# Altium PCB stepperMountBoard.PcbDoc
Units mm, origin at the board's own origin, x right, y up, seen from the top; angles counter-clockwise.
Board outline 50 x 250 mm, 2 copper layers (Top Layer, Bottom Layer); 12 components, 0 nets, 26 pads, 0 vias.
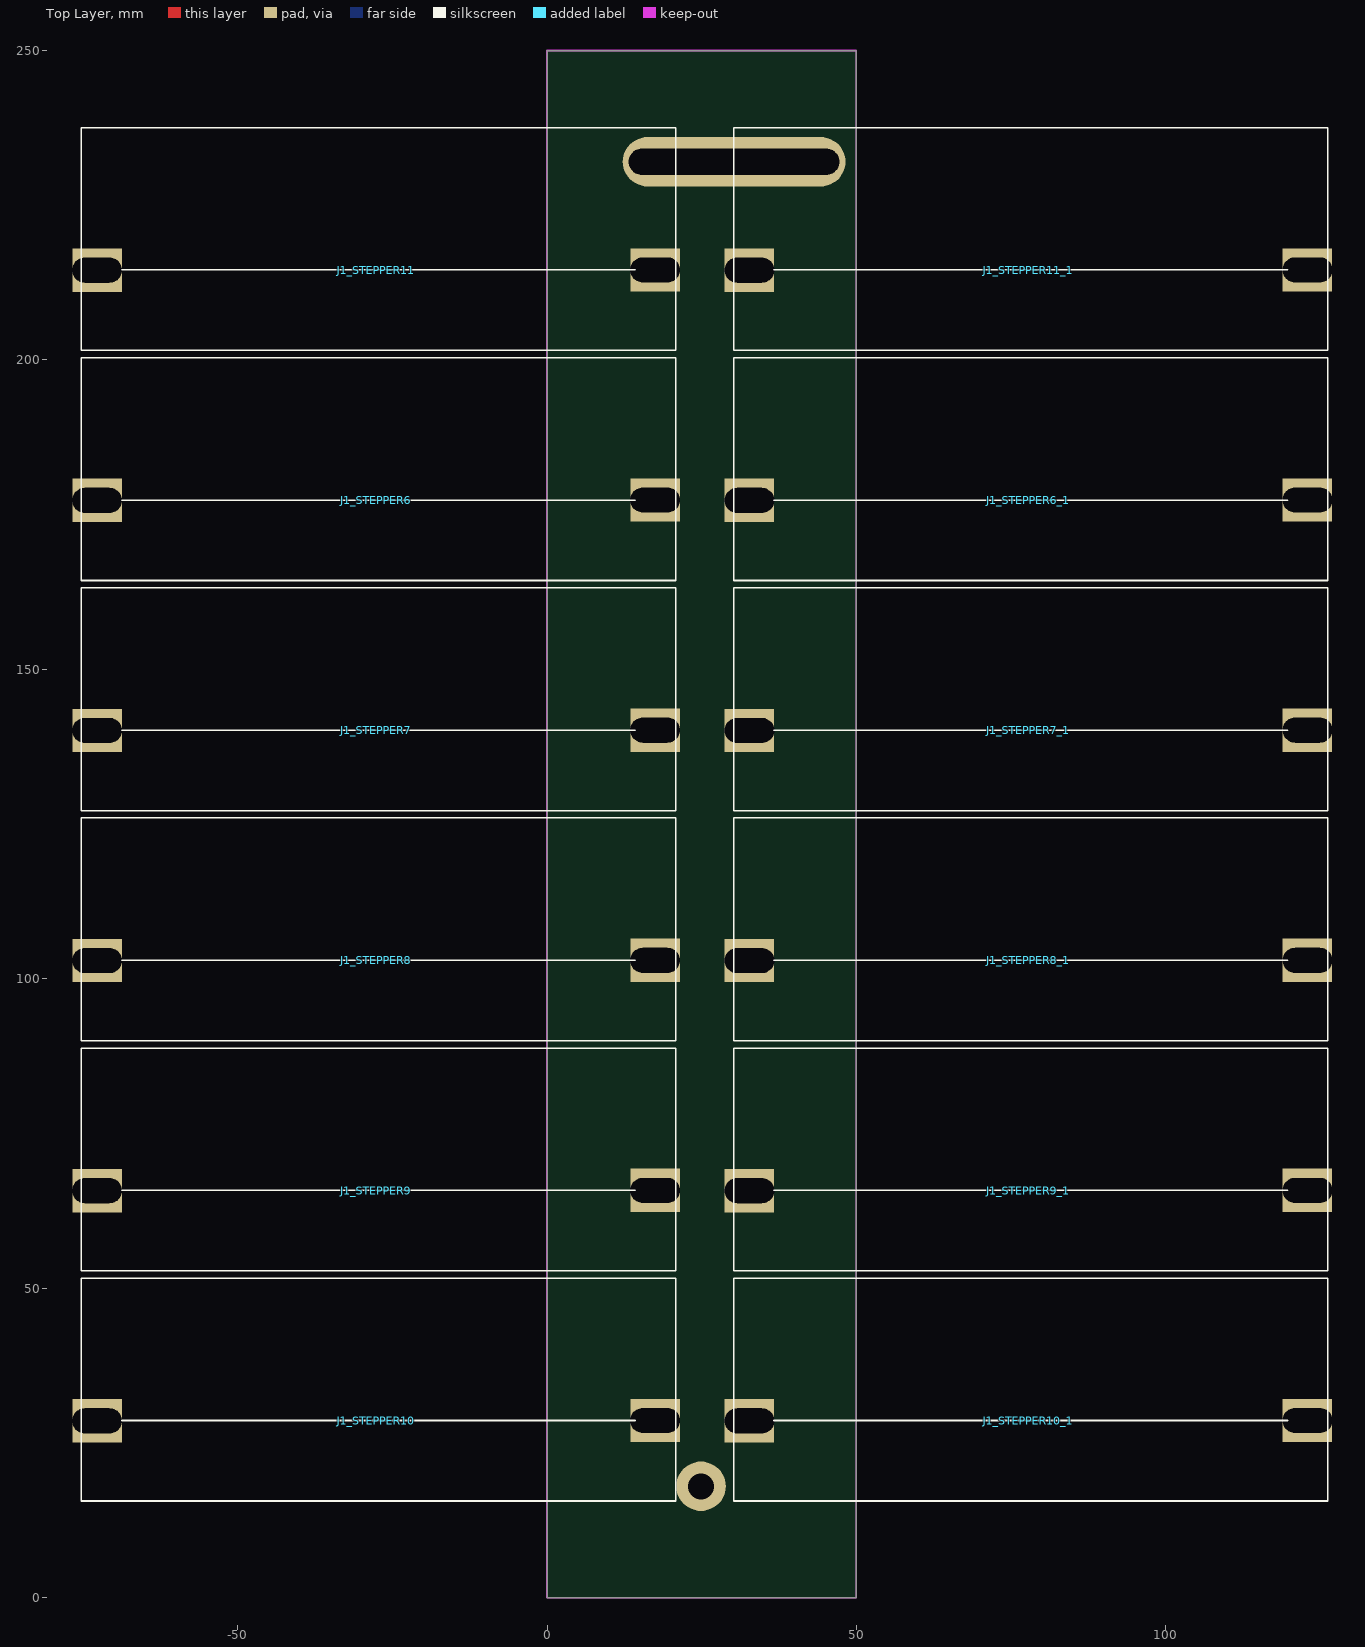
[diagram p0: Top Layer view]
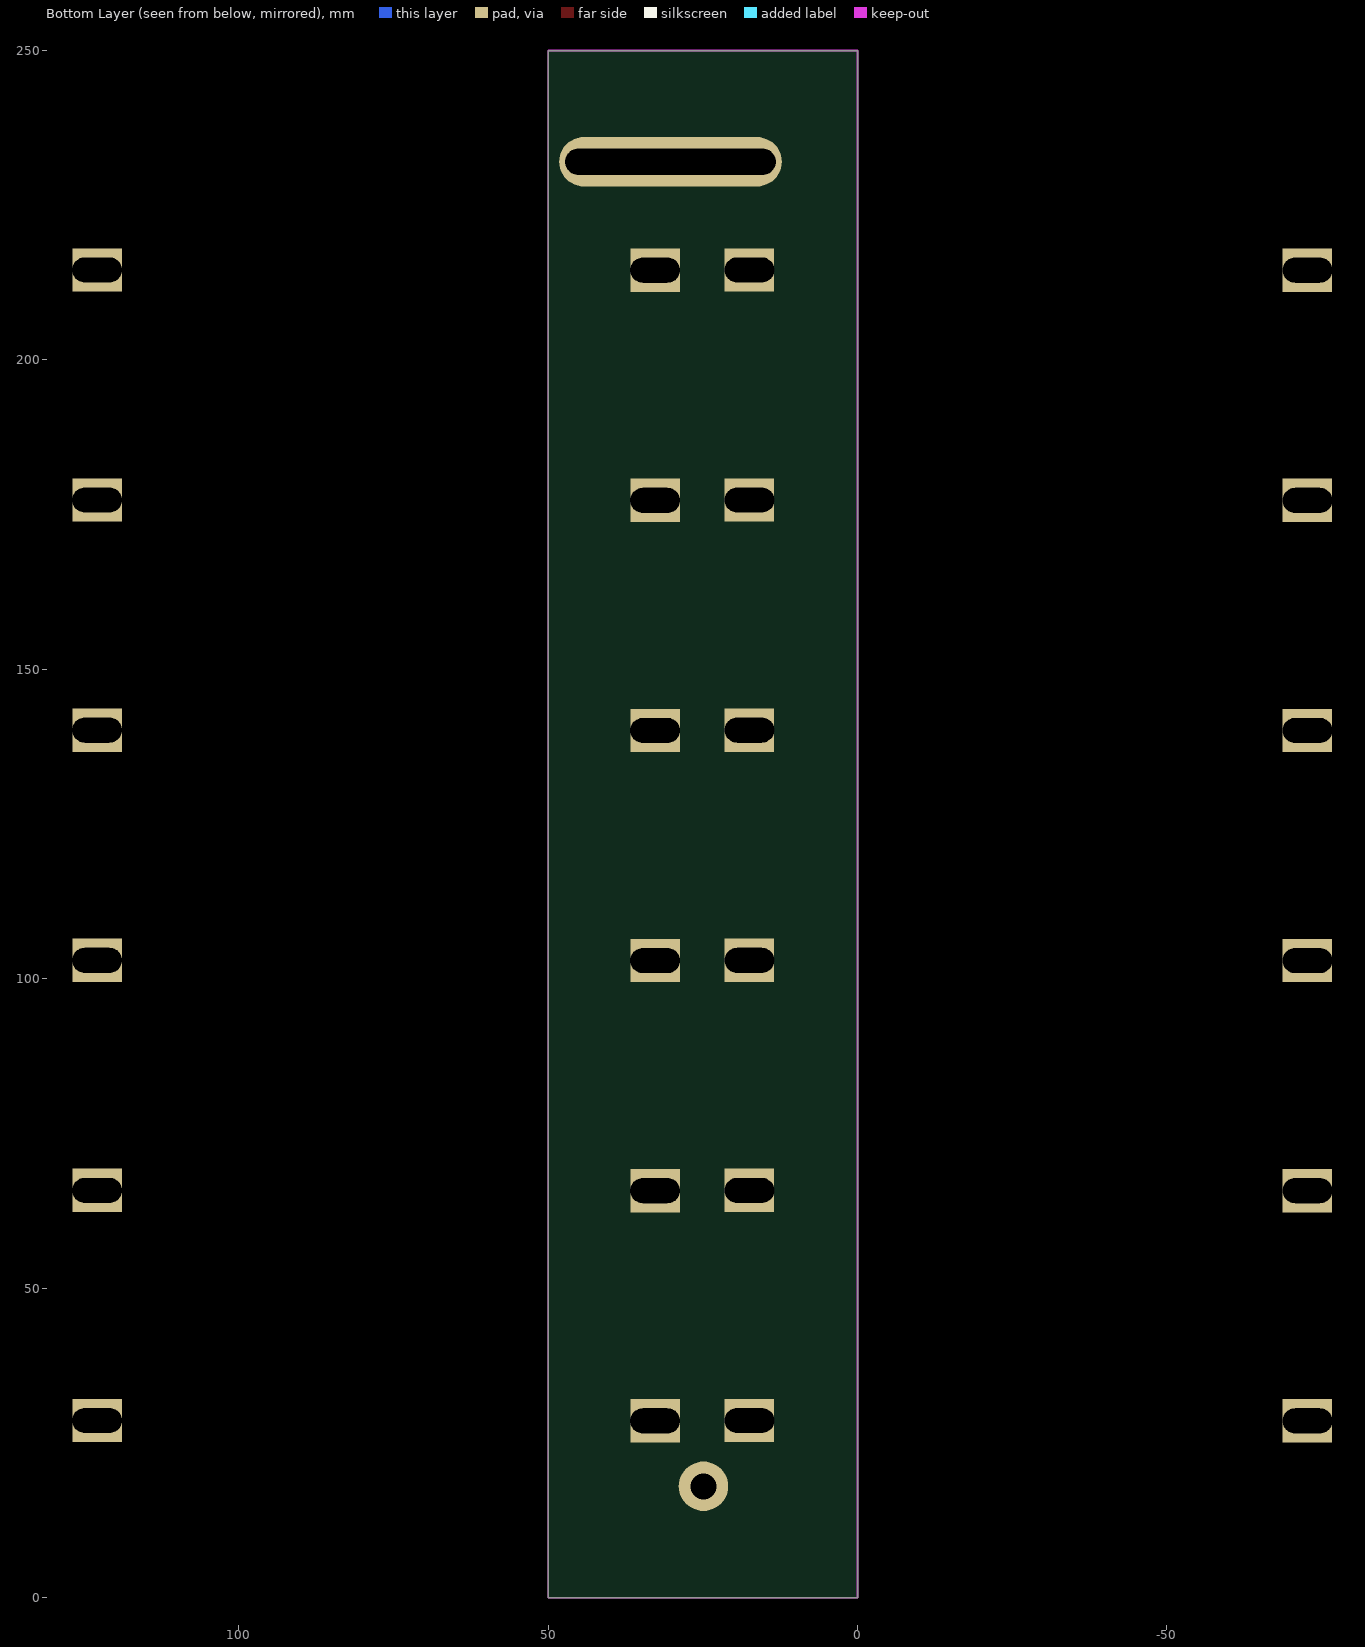
[diagram p1: Bottom Layer view, seen from below]

## Layer stack, top to bottom
Top Layer: signal copper 0.0356
Dielectric: dielectric 0.32, FR-4, Dk 4.8
Bottom Layer: signal copper 0.0356

## Board outline
0,0 0,250 50,250 50,0

## Design rules (kind name [scope] priority, off if disabled: settings)
Clearance [All] p1: gap=0.254
PolygonConnect [All] p1: connectstyle=Relief reliefconductorwidth=0.254 reliefentries=4 polygonreliefangle="90 Angle" airgapwidth=0.254
RoutingVias [All] p1: holewidth=0.711 width=1.27 viastyle="Through Hole" minholewidth=0.711 minwidth=1.27 maxholewidth=0.711 maxwidth=1.27
SolderMaskExpansion [All] p1: expansion=0.102
Width [All] p1: maxlimit=0.254 minlimit=0.254 preferedwidth=0.254
28 further rules are at their usual default settings.

## Components (designator, comment, footprint, x,y, rotation, side; value= is the part's Value field where it differs from the comment)
J1_STEPPER6 "Socket" PCBComponent_1 20.769,164.363 r90 top (schematic designator J1)
J1_STEPPER6_1 "Socket" PCBComponent_1 126.179,164.363 r90 top (schematic designator J1)
J1_STEPPER7 "Socket" PCBComponent_1 20.769,127.178 r90 top (schematic designator J1)
J1_STEPPER7_1 "Socket" PCBComponent_1 126.179,127.178 r90 top (schematic designator J1)
J1_STEPPER8 "Socket" PCBComponent_1 20.769,89.992 r90 top (schematic designator J1)
J1_STEPPER8_1 "Socket" PCBComponent_1 126.179,89.992 r90 top (schematic designator J1)
J1_STEPPER9 "Socket" PCBComponent_1 20.769,52.807 r90 top (schematic designator J1)
J1_STEPPER9_1 "Socket" PCBComponent_1 126.179,52.807 r90 top (schematic designator J1)
J1_STEPPER10 "Socket" PCBComponent_1 20.769,15.621 r90 top (schematic designator J1)
J1_STEPPER10_1 "Socket" PCBComponent_1 126.179,15.621 r90 top (schematic designator J1)
J1_STEPPER11 "Socket" PCBComponent_1 20.769,201.549 r90 top (schematic designator J1)
J1_STEPPER11_1 "Socket" PCBComponent_1 126.179,201.549 r90 top (schematic designator J1)

## Footprints (in the part's own frame and the unit in brackets; to place one, negate y for a bottom-side part, rotate by r counter-clockwise, add the part's x,y. Pads: shape width x height; smd on the part's side, far side on the other; paste and mask are expansions set on the pad)
PCBComponent_1 [mm]
  rect 7x8 hole 4 slot 8 at 90 deg: 9(12.954,93.472) 9(13,3.302)
  silkscreen extent 0,0 36,96

## Free pads (board coordinates)
  round 8 hole 4.2: 0(24.892,18)
  oval 36x8 hole 4.2 slot 34 at 0 deg: 0(30.226,232.029)

## Nets (pads, with @x,y where several pads share a name; then routed paths per layer and width w, separated by ;. In a path a pad name is that pad's centre, name@x,y a point inside that pad or via, vN(x,y) a via of type N, cw(c..) or ccw(c..) an arc to the next point about the centre after c; other vN are vias at no path point)
pads on no net: J1_STEPPER6.9 J1_STEPPER6_1.9 J1_STEPPER7.9 J1_STEPPER7_1.9 J1_STEPPER8.9 J1_STEPPER8_1.9 J1_STEPPER9.9 J1_STEPPER9_1.9 J1_STEPPER10.9 J1_STEPPER10_1.9 J1_STEPPER11.9 J1_STEPPER11_1.9

## Keep-outs
Keep-Out Layer:
  the board outline again, w0.254